# Altium PCB PCB.PcbDoc
Units mil, origin at the board's own origin, x right, y up, seen from the top; angles counter-clockwise.
Board outline 6000 x 4000 mil, 2 copper layers (Top Layer, Bottom Layer); 80 components, 95 nets, 329 pads, 0 vias.
Unrouted connection lines stored in the file: 164.
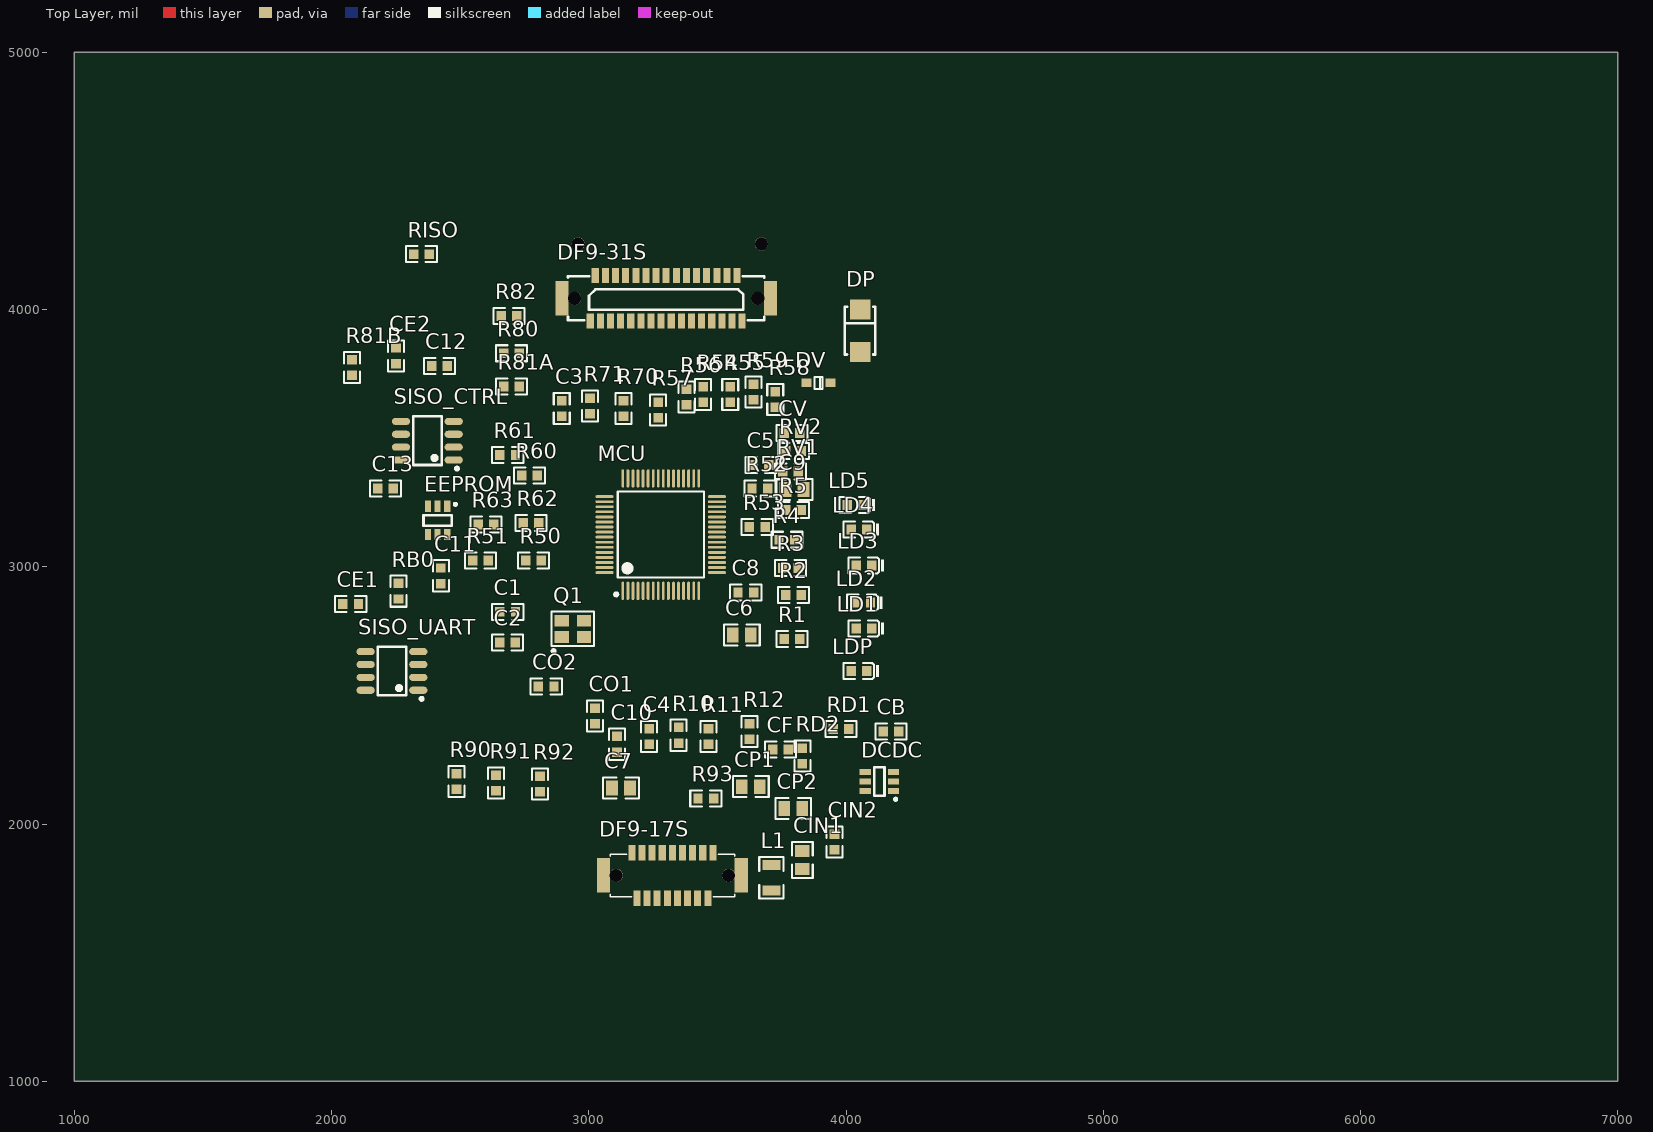
[diagram p0: Top Layer view]
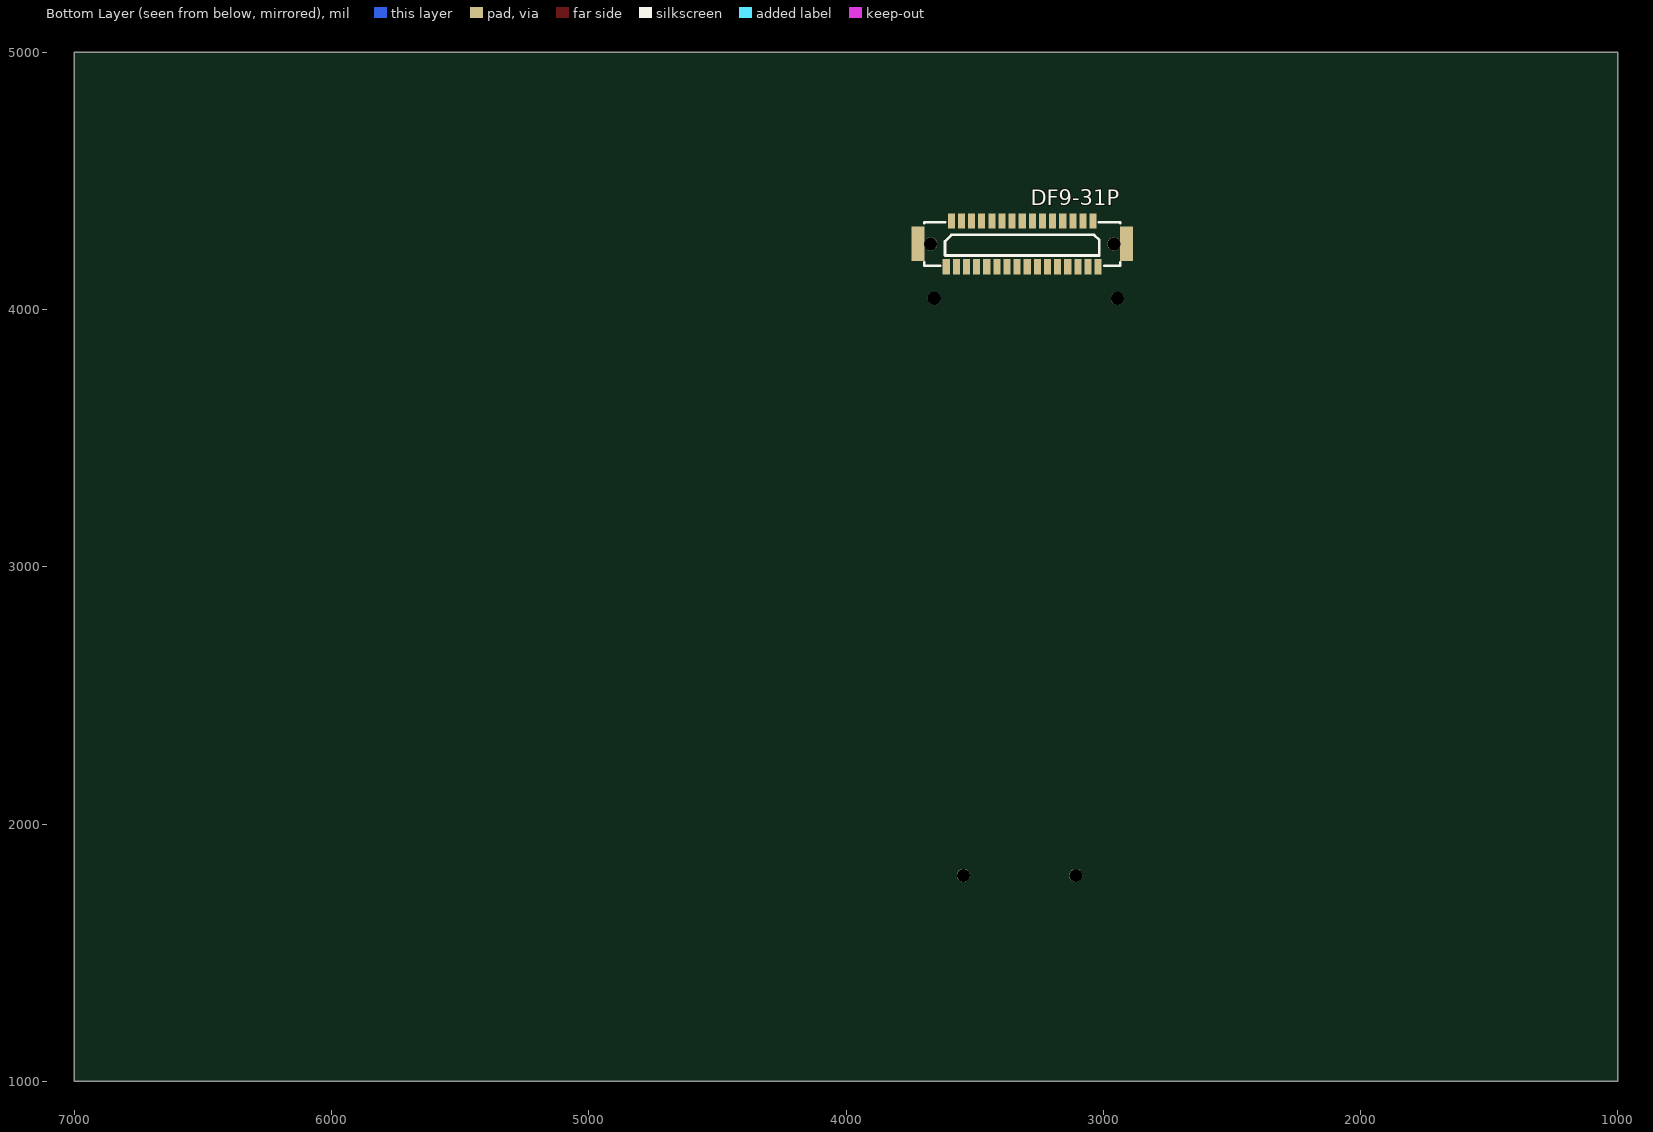
[diagram p1: Bottom Layer view, seen from below]

## Layer stack, top to bottom
Top Solder: solder mask 0.4, Solder Resist, Dk 3.5
Top Layer: signal copper 1.4
Dielectric 1: dielectric 12.6, FR-4, Dk 4.8
Bottom Layer: signal copper 1.4
Bottom Solder: solder mask 0.4, Solder Resist, Dk 3.5

## Board outline
1000,1000 7000,1000 7000,5000 1000,5000

## Design rules (kind name [scope] priority, off if disabled: settings)
Clearance [All] p1: gap=10 ignorepadtopadclearanceinfootprint=FALSE except(0: Arc-Hole Track-Hole SMDPad-Hole THPad-Hole Via-Hole Fill-Hole Poly-Hole Region-Hole Text-Hole)
PolygonConnect [All] p1: connectstyle=Relief reliefconductorwidth=10 reliefentries=4 polygonreliefangle="90 Angle" airgapwidth=10
RoutingVias [All] p1: holewidth=28 width=50 viastyle="Through Hole" minholewidth=28 minwidth=50 maxholewidth=28 maxwidth=50
SolderMaskExpansion [All] p1: expansion=4 istentingtop=FALSE
Width [All] p1: maxlimit=10 minlimit=10 preferedwidth=10
30 further rules are at their usual default settings.

## Components (designator, comment, footprint, x,y, rotation, side; value= is the part's Value field where it differs from the comment)
C1 "100n" LC-0603_R 2685,2825 r0 top
C2 "100n" LC-0603_R 2684.68,2705 r0 top
C3 "100n" LC-0603_R 2895,3615 r90 top
C4 "100n" LC-0603_R 3235,2340 r90 top
C5 "100n" LC-0603_R 3669.68,3395 r0 top
C6 "4u7 (3V3)" LC-0805_R 3595,2735 r0 top
C7 "1u (3V3)" LC-0805_R 3125,2140 r0 top
C8 "100n" LC-0603_R 3610.31,2900 r0 top
C9 "4u7 (3V3)" LC-0805_R 3800.04,3300 r0 top
C10 "100n" LC-0603_R 3110.31,2310 r90 top
C11 "100n" LC-0603_R 2424.68,2965 r90 top
C12 "100n" LC-0603_R 2419.68,3780 r0 top
C13 "100n" LC-0603_R 2210,3305 r0 top
CB "100n" LC-0603_R 4174.68,2360 r0 top
CE1 "100n" LC-0603_R 2074.68,2855 r0 top
CE2 "100n" LC-0603_R 2250,3820 r90 top
CF "56p" LC-0603_R 3745,2290 r0 top
CIN1 "10u (16V)" LC-0805_R 3830,1859.96 r90 top
CIN2 "100n" LC-0603_R 3955,1930 r90 top
CO1 "10p" LC-0603_R 3025,2420 r90 top
CO2 "10p" LC-0603_R 2834.68,2535 r0 top
CP1 "22u (3V3)" LC-0805_R 3629.96,2145 r0 top
CP2 "22u (3V3)" LC-0805_R 3795,2060 r0 top
CV "10nF" LC-0603_R 3790,3520 r0 top
DCDC "TPS54202" LC-SOT-23-6 4130,2165 r0 top
DF9-17S "DF9-17S" CONN-SMD_DF9-17S-1V-32 3325,1800 r180 top
DF9-31P "DF9-31S" CONN-SMD_DF9-31S-1V 3315,4255 r180 bottom
DF9-31S "DF9-31S" CONN-SMD_DF9-31S-1V 3300.95,4043.58 r0 top
DP "low Vf Schottky" LC-SMA(DO-214AC)_S1 4055,3917.68 r270 top
DV "( MM3Z3V3T1G )" LC-SOD-323 3893.54,3715 r180 top
EEPROM "24AA025UID" LC-SOT-23-6 2412.6,3179.88 r90 top
L1 "10u" "LC-SMD-3215_2P FC - 135" 3710,1790.79 r90 top
LD1 "GREEN" LC-0603_LED_S1 4069.69,2760 r180 top
LD2 "WHITE" LC-0603_LED_S1 4065,2860.31 r180 top
LD3 "YELLOW" LC-0603_LED_S1 4070,3005 r180 top
LD4 "RED" LC-0603_LED_S1 4050,3145 r180 top
LD5 "ORANGE" LC-0603_LED_S1 4035,3240 r180 top
LDP "BLUE" LC-0603_LED_S1 4050,2594.68 r180 top
MCU "STM32F446RE_LQFP64" LC-LQFP-64_10x10x05P 3280,3125 r0 top
Q1 "TSX-3225" LC-SMD-3225_4P 2938.31,2758.5 r0 top
R1 "15k" LC-0603_R 3790.31,2720 r0 top
R2 "3k3" LC-0603_R 3795.31,2890 r0 top
R3 "1k8" LC-0603_R 3784.68,2995 r0 top
R4 "1k8" LC-0603_R 3770,3105 r0 top
R5 "1k8" LC-0603_R 3795.31,3220 r0 top
R10 "1k" LC-0603_R 3349.68,2345 r90 top
R11 "1k" LC-0603_R 3465,2340 r90 top
R12 "1k" LC-0603_R 3625,2360 r90 top
R50 "1k" LC-0603_R 2785,3024.68 r0 top
R51 "100k" LC-0603_R 2579.68,3025 r0 top
R52 "1k" LC-0603_R 3665,3305 r0 top
R53 "100k" LC-0603_R 3655,3155 r0 top
R54 "( 1k )" LC-0603_R 3445,3669.68 r90 top
R55 "( 100k )" LC-0603_R 3550,3670 r90 top
R56 "470" LC-0603_R 3380,3659.68 r90 top
R57 "470" LC-0603_R 3270,3610 r90 top
R58 "470" LC-0603_R 3725,3650 r90 top
R59 "100k" LC-0603_R 3640,3680 r90 top
R60 "330" LC-0603_R 2770,3354.68 r0 top
R61 "4k7" LC-0603_R 2685,3435 r0 top
R62 "330" LC-0603_R 2775,3170 r0 top
R63 "4k7" LC-0603_R 2600,3164.68 r0 top
R70 "470" LC-0603_R 3135,3614.68 r90 top
R71 "470" LC-0603_R 3005,3625.31 r90 top
R80 "1k" LC-0603_R 2699.68,3830 r0 top
R81A "( 100k )" LC-0603_R 2700,3700.31 r0 top
R81B "( 100k )" LC-0603_R 2080,3775 r90 top
R82 "1k" LC-0603_R 2690.31,3975 r0 top
R90 "1k" LC-0603_R 2485,2165 r90 top
R91 "1k" LC-0603_R 2640,2159.68 r90 top
R92 "1k" LC-0603_R 2810,2155 r90 top
R93 "1k" LC-0603_R 3455,2099.68 r0 top
RB0 "10k" LC-0603_R 2260,2905 r90 top
RD1 "22k" LC-0603_R 3980,2370 r0 top
RD2 "100k" LC-0603_R 3830,2264.68 r90 top
RISO "10M" LC-0603_R 2350,4215 r0 top
RV1 "22k" LC-0603_R 3784.68,3370 r0 top
RV2 "100k" LC-0603_R 3795.31,3450 r0 top
SISO_CTRL "ISO7021F" LC-SOP-8_150mil 2372.64,3490 r90 top
SISO_UART "ISO7021" LC-SOP-8_150mil 2235,2595 r90 top

## Footprints (in the part's own frame and the unit in brackets; to place one, negate y for a bottom-side part, rotate by r counter-clockwise, add the part's x,y. Pads: shape width x height; smd on the part's side, far side on the other; paste and mask are expansions set on the pad)
CONN-SMD_DF9-17S-1V-32 [mm]
  rect 0.7x1.5 smd paste+0 mask+0.051: 1(-4,-2.25) 2(-3.5,2.25) 3(-3,-2.25) 4(-2.5,2.25) 5(-2,-2.25) 6(-1.5,2.25) 7(-1,-2.25) 8(-0.5,2.25) 9(0,-2.25) 10(0.5,2.25) 11(1,-2.25) 12(1.5,2.25) 13(2,-2.25) 14(2.5,2.25) 15(3,-2.25) 16(3.5,2.25) 17(4,-2.25)
  rect 1.3x3.4 smd paste+0 mask+0.051: 18(6.8,0) 19(-6.8,0)
  round 1.3 hole 1.3 unplated paste+0: ""(-5.55,0) ""(5.55,0)
  silkscreen extent -6.15,-2.1 6.15,2.1
CONN-SMD_DF9-31S-1V [mm]
  rect 0.7x1.5 smd paste+0 mask+0.051: 1(-7.5,-2.25) 2(-7,2.25) 3(-6.5,-2.25) 4(-6,2.25) 5(-5.5,-2.25) 6(-5,2.25) 7(-4.5,-2.25) 8(-4,2.25) 9(-3.5,-2.25) 10(-3,2.25) 11(-2.5,-2.25) 12(-2,2.25) 13(-1.5,-2.25) 14(-1,2.25) 15(-0.5,-2.25) 16(0,2.25) 17(0.5,-2.25) 18(1,2.25) 19(1.5,-2.25) 20(2,2.25) 21(2.5,-2.25) 22(3,2.25) 23(3.5,-2.25) 24(4,2.25) 25(4.5,-2.25) 26(5,2.25) 27(5.5,-2.25) 28(6,2.25) 29(6.5,-2.25) 30(7,2.25) 31(7.5,-2.25)
  rect 1.3x3.4 smd paste+0 mask+0.051: 32(10.3,0) 33(-10.3,0)
  round 1.3 hole 1.3 unplated paste+0: ""(-9.05,0) ""(9.05,0)
  silkscreen extent -9.69,-2.16 9.69,2.16
LC-0603_LED_S1 [mm]
  rect 0.93x0.98 smd: A(0.77,0) K(-0.77,0)
  silkscreen extent -1.98,-0.79 1.54,0.79, body extent -0.8,-0.4 0.8,0.4, height 0.6
LC-0603_R [mm]
  rect 0.93x0.98 smd: 1(-0.77,0) 2(0.77,0)
  silkscreen extent -1.53,-0.79 1.54,0.79, body extent -0.85,-0.4 0.85,0.4, height 0.56
LC-0805_R [mm]
  rect 1.16x1.47 smd: 1(-0.89,0) 2(0.89,0)
  silkscreen extent -1.77,-1.04 1.77,1.03, body extent -1,-0.62 1,0.63, height 0.49
LC-LQFP-64_10x10x05P [mm]
  oval 0.28x1.8 smd mask+0.051: 1(-3.75,-5.55) 2(-3.25,-5.55) 3(-2.75,-5.55) 4(-2.25,-5.55) 5(-1.75,-5.55) 6(-1.25,-5.55) 7(-0.75,-5.55) 8(-0.25,-5.55) 9(0.25,-5.55) 10(0.75,-5.55) 11(1.25,-5.55) 12(1.75,-5.55) 13(2.25,-5.55) 14(2.75,-5.55) 15(3.25,-5.55) 16(3.75,-5.55) 33(3.75,5.55) 34(3.25,5.55) 35(2.75,5.55) 36(2.25,5.55) 37(1.75,5.55) 38(1.25,5.55) 39(0.75,5.55) 40(0.25,5.55) 41(-0.25,5.55) 42(-0.75,5.55) 43(-1.25,5.55) 44(-1.75,5.55) 45(-2.25,5.55) 46(-2.75,5.55) 47(-3.25,5.55) 48(-3.75,5.55)
  oval 1.8x0.28 smd mask+0.051: 17(5.55,-3.75) 18(5.55,-3.25) 19(5.55,-2.75) 20(5.55,-2.25) 21(5.55,-1.75) 22(5.55,-1.25) 23(5.55,-0.75) 24(5.55,-0.25) 25(5.55,0.25) 26(5.55,0.75) 27(5.55,1.25) 28(5.55,1.75) 29(5.55,2.25) 30(5.55,2.75) 31(5.55,3.25) 32(5.55,3.75) 49(-5.55,3.75) 50(-5.55,3.25) 51(-5.55,2.75) 52(-5.55,2.25) 53(-5.55,1.75) 54(-5.55,1.25) 55(-5.55,0.75) 56(-5.55,0.25) 57(-5.55,-0.25) 58(-5.55,-0.75) 59(-5.55,-1.25) 60(-5.55,-1.75) 61(-5.55,-2.25) 62(-5.55,-2.75) 63(-5.55,-3.25) 64(-5.55,-3.75)
  silkscreen extent -4.55,-6.05 4.25,4.25
LC-SMA(DO-214AC)_S1 [mm]
  rect 2x2 smd: 1(2.1,0) 2(-2.1,0)
  silkscreen extent -2.35,-1.5 2.35,1.5
"LC-SMD-3215_2P FC - 135" [mm]
  rect 1x1.8 smd: 1(-1.25,0) 2(1.25,0)
  silkscreen extent -2.05,-1.2 2.05,1.2
LC-SMD-3225_4P [mm]
  rect 1.4x1.15 smd: 1(-1.1,-0.8) 2(1.1,-0.8) 3(1.1,0.8) 4(-1.1,0.8)
  silkscreen extent -2.1,-2.35 2.1,1.7, body extent -1.6,-1.25 1.6,1.25, height 0.61
LC-SOD-323 [mm]
  rect 1x0.83 smd: 1(1.18,0) 2(-1.18,0)
  silkscreen extent -0.4,-0.6 0.4,0.6, body extent -1.35,-0.62 1.35,0.63, height 1.1
LC-SOP-8_150mil [mm]
  oval 0.7x1.8 smd: 1(-1.905,-2.6) 2(-0.635,-2.6) 3(0.635,-2.6) 4(1.905,-2.6) 5(1.905,2.6) 6(0.635,2.6) 7(-0.635,2.6) 8(-1.905,2.6)
  silkscreen extent -2.9,-3.08 2.4,1.4, body extent -2.5,-3.1 2.5,3.1, height 1.75
LC-SOT-23-6 [mm]
  rect 1.1x0.6 smd: 1(1.4,-0.95) 2(1.4,0) 3(1.4,0.95) 4(-1.4,0.95) 5(-1.4,0) 6(-1.4,-0.95)
  silkscreen extent -0.5,-1.87 1.73,1.4

## Part data
C1 C2 C3 C4 C5 C8 C10 C11 C12 C13 CB CE1 CE2 CF CIN2 CO1 CO2 CV: library part CC0603, DeviceName=C0603, DeviceSetName=C, GateName_1=G$1, LibraryName=myrcl, SpiceOrder1="SpiceOrder 1", SpiceOrder2="SpiceOrder 2", SymbolName_1=C
C6 C7 C9 CIN1 CP1 CP2: library part CC0805, DeviceName=C0805, DeviceSetName=C, GateName_1=G$1, LibraryName=myrcl, SpiceOrder1="SpiceOrder 1", SpiceOrder2="SpiceOrder 2", SymbolName_1=C
DCDC: PARTNUMBER=TPS54202DDCR, DeviceSetName=TPS54202, GateName_1=A, LibraryName=tps54202, MOUNTTYPE=SMT, SymbolName_1=TPS54202DDC
DF9-31P DF9-31S: "SMD CONNECTOR   Source: con-hirose.lbr from Bob Starr <rtzaudio@mindspring.com>", MPN=DF9-31S-1V(32), DeviceSetName=DF9-31S, GateName_1=DF9, LibraryName=con-hirose, MF=MF, OC_FARNELL=1798382, OC_NEWARK=74R3383, SymbolName_1=DF9-31S
DP: library part DIODE-DO-214AC, "DIODE", DeviceName=DO-214AC, DeviceSetName=DIODE-, GateName_1=G$1, LibraryName=diode, SpiceOrder1="SpiceOrder 1", SpiceOrder2="SpiceOrder 2", SymbolName_1=D
DV: library part DSOD323, "DIODE", MPN=CDSOD323-T05C, DeviceName=SOD323, DeviceSetName=D, GateName_1=G$1, LibraryName=zetex, MF=MF, OC_FARNELL=1824860, OC_NEWARK=79R6078, POPULARITY=0, SymbolName_1=DIODE
L1: library part VLCF5028-2, DeviceSetName=VLCF5028-2, GateName_1=G$1, LibraryName=VLCF5028, SymbolName_1=L-US
LD1 LD2 LD3 LD4 LD5 LDP: library part LED0603, DeviceSetName=LED0603, GateName_1=G$1, LibraryName=myrcl, SymbolName_1=LED
Q1: library part KX-7, "Quartz Crystals (MHz) SMD: KX - Serie                  	                 Model    	          Size l/w/h [mm]    	          Frequency Range    	          Frequency       Stability    	          Temp. Range [掳C]     	          Load       Capacitance    	          AECQ 200       availabel    	          Datasheet    	                 KX-4       KX-5       KX-6       KX-7       KX-9A       KX-9B       KX-12A       KX-12B       KX-13       KX-20       KX-K       KX-KS      	          1.6/1.2/0.3       2.0/1.6/0.45       2.5/2.0/0.55       3.2/2.5/0.8       5.0/3.2/1.0        5.0/3.2/1.1        6.0/3.5/1.1        6.0/3.5/1.0        7.0/5.0 /1.3        11.6/5.5/1.6        12.3/4.5/4.2        12.3/4.5/3.2      	          24.0 ~ 80.0 MHz       16.0 ~ 80.0 MHz       12.0 ~ 80.0 MHz       8.0 ~ 60.0 MHz       7,68 ~ 300,0 MHz       8,0 ~ 50,0 MHz       8,0 ~ 150,0 MHz       8,0 ~ 50,0 MHz       6,0 ~ 160,0 MHz       3,579 ~ 25,0 MHz       3,579 ~ 70,0 MHz       3,579 ~ 70,0 MHz     	          卤10 鈥?卤50ppm       卤10 鈥?卤50ppm       卤10 鈥?卤50ppm       卤10 鈥?卤50ppm       卤10 鈥?卤50ppm       卤10 鈥?卤50ppm       卤10 鈥?卤50ppm       卤10 鈥?卤50ppm       卤10 鈥?卤50ppm       卤50ppm       卤10 鈥?卤50ppm       卤10 鈥?卤50ppm     	         (*) -40掳C 鈥?85掳C      (*) -40掳C 鈥?125掳C      (*) -40掳C 鈥?125掳C      (*) -40掳C 鈥?125掳C      (*) -40掳C 鈥?105掳C      (*) -40掳C 鈥?105掳C      (*) -40掳C 鈥?125掳C      (*) -40掳C 鈥?105掳C      (*) -40掳C 鈥?105掳C      (*) -40掳C 鈥?105掳C      (*) -40掳C 鈥?85掳C      (*) -40掳C 鈥?85掳C     	          8, 8鈥?6       8, 8鈥?6       10, 8鈥?6       12, 7鈥?0       16, 10鈥?0       16, 10鈥?0       16, 10鈥?0       16, 12鈥?0       16, 12鈥?0       16, 12鈥?0       16, 12鈥?0       16, 12鈥?0     	         -      yes       yes     yes       -       -       -       -       -       -       -       -     	          KX-4.pdf       KX-5.pdf       KX-6.pdf       KX-7.pdf       KX-9A.pdf       KX-9B.pdf       KX-12A.pdf       KX-12B.pdf       KX-13.pdf       KX-20.pdf       KX-K.pdf       KX-KS.pdf     	  	       Details see: http://www.geyer-electronic.de/Frequenz-Produkte.9.0.html   Created 2016-06-07, Hans Locher 2016 (C) Geyer Quartz Technology   KX4,KX5,KX6,KX7,KX9A,KX9B,KX12A,KX12B,KX13,KX20,KXK,KXKS;1612;2016;2520;3225;5032;6035;7050;11655;12345;1,6x1,2;2,0x1,6;2,5x2,0;3,2x2,5;5,0x3,2;6,0x3,5;7,0x5,0;11,6x5,5;12,3x4,5;12,3x4,5;1.6x1.2;2.0x1.6;2.5x2.0;3.2x2.5;5.0x3.2;6.0x3.5;7.0x5.0;11.6x5.5;12.3x4.5;12.3x4.5;", 1=1, 2=2, DeviceName=-7, DeviceSetName=KX, GateName_1=G$1, LibraryName=crystal-geyer_V1_0, SymbolName_1=Q
R1 R2 R3 R4 R5 R10 R11 R12 R50 R51 R52 R53 R54 R55 R56 R57 R58 R59 R60 R61 R62 R63 R70 R71 R80 R81A R81B R82 R90 R91 R92 R93 RB0 RD1 RD2 RISO RV1 RV2: library part RR0603, DeviceName=R0603, DeviceSetName=R, GateName_1=G$1, LibraryName=myrcl, SpiceOrder1="SpiceOrder 1", SpiceOrder2="SpiceOrder 2", SymbolName_1=R
SISO_CTRL: library part ISO7021, DeviceSetName=ISO7021, GateName_1=G$1, LibraryName=iso7021, SymbolName_1=ISO7021
DF9-17S: DeviceSetName=DF9-17S, GateName_1=G$1, LibraryName=con-hirose, SymbolName_1=DF9-17S
EEPROM: Array=Array, DeviceSetName=24AA025UID, EEPROM=EEPROM, GateName_1=G$1, GND=GND, LibraryName=24AA02UID, SymbolName_1=24AA, VCC=VCC
MCU: DeviceSetName=STM32F446RE_LQFP64, GateName_1=G$1, LibraryName=stm32f446re, SymbolName_1=STM32F446RE
SISO_UART: DeviceSetName=ISO7021, GateName_1=G$1, LibraryName=iso7021, SymbolName_1=ISO7021

## Nets (pads, with @x,y where several pads share a name; then routed paths per layer and width w, separated by ;. In a path a pad name is that pad's centre, name@x,y a point inside that pad or via, vN(x,y) a via of type N, cw(c..) or ccw(c..) an arc to the next point about the centre after c; other vN are vias at no path point)
+3V3: C1.1 C2.1 C3.1 C4.1 C5.1 C6.1 C7.1 C8.1 C11.1 C12.1 C13.1 CF.1 CP1.1 CP2.1 DF9-17S.1 DF9-31P.20 DF9-31P.28 DF9-31S.4 DF9-31S.12 EEPROM.6 L1.2 MCU.32 MCU.48 MCU.64 R50.2 R51.1 R51.2 R53.1 R55.1 R61.2 R63.2 RD2.2 SISO_CTRL.8 SISO_UART.8
+12V: CIN1.1 CIN2.1 DCDC.3 DF9-31P.16 DF9-31P.17 DF9-31S.15 DF9-31S.16 RV2.2
DGND: C1.2 C2.2 C3.2 C4.2 C5.2 C6.2 C7.2 C8.2 C9.2 C10.2 C11.2 C12.2 C13.2 CO1.2 CO2.2 CP1.2 CP2.2 CV.2 DF9-17S.5 DF9-31P.4 DF9-31S.28 DV.2 EEPROM.2 EEPROM.4 EEPROM.5 MCU.31 MCU.47 MCU.63 Q1.2 Q1.4 R59.1 R81A.1 RB0.1 RD1.1 RISO.2 RV1.1 SISO_CTRL.5 SISO_UART.5
GND: CIN1.2 CIN2.2 DCDC.1 DF9-31P.18 DF9-31P.19 DF9-31S.13 DF9-31S.14
GNDI: CE1.2 CE2.2 DF9-17S.8 R81B.2 RISO.1 SISO_CTRL.4 SISO_UART.4
NetC9_1: C9.1
NetC10_1: C10.1 R93.2
NetCB_1: CB.1 DCDC.6
NetCB_2: CB.2 DCDC.2 L1.1
NetCE1_1: CE1.1 CE2.1 DF9-17S.6 SISO_CTRL.1 SISO_UART.1
NetCF_2: CF.2 DCDC.4 RD1.2 RD2.1
NetCO1_1: CO1.1 Q1.3
NetCO2_1: CO2.1 Q1.1
NetCOM_2: 
NetCOM_4: DF9-17S.4 SISO_UART.3
NetCOM_5: DF9-17S.2 SISO_UART.2
NetCOM_6: 
NetCOM_7: DF9-17S.12 SISO_CTRL.2
NetCOM_8: DF9-17S.10 R81B.1 SISO_CTRL.3
NetCV_1: CV.1 DV.1 RV1.2 RV2.1
NetDCDC_5: DCDC.5
NetDF9-17S_3: DF9-17S.3 R90.2
NetDF9-17S_7: DF9-17S.7 R91.2
NetDF9-17S_9: DF9-17S.9 R93.1
NetDF9-17S_11: DF9-17S.11 R92.1
NetDF9-17S_13: DF9-17S.13 R1.2
NetDF9-17S_14: DF9-17S.14 R5.2
NetDF9-17S_15: DF9-17S.15 R2.2
NetDF9-17S_16: DF9-17S.16 R4.2
NetDF9-17S_17: DF9-17S.17 R3.2
NetDF9-31P_1: DF9-31P.1 DF9-31S.31
NetDF9-31P_2: DF9-31P.2 DF9-31S.30
NetDF9-31P_3: DF9-31P.3 DF9-31S.29
NetDF9-31P_5: DF9-31P.5 DF9-31S.27
NetDF9-31P_6: DF9-31P.6 DF9-31S.26
NetDF9-31P_7: DF9-31P.7 DF9-31S.25
NetDF9-31P_8: DF9-31P.8 DF9-31S.24
NetDF9-31P_9: DF9-31P.9 DF9-31S.23
NetDF9-31P_10: DF9-31P.10 DF9-31S.22
NetDF9-31P_11: DF9-31P.11 DF9-31S.21
NetDF9-31P_12: DF9-31P.12 DF9-31S.20
NetDF9-31P_13: DF9-31P.13 DF9-31S.19
NetDF9-31P_14: DF9-31P.14 DF9-31S.18
NetDF9-31P_15: DF9-31P.15 DF9-31S.17
NetDF9-31P_21: DF9-31P.21 DF9-31S.11 R10.2
NetDF9-31P_22: DF9-31P.22 DF9-31S.10 R12.2
NetDF9-31P_23: DF9-31P.23 DF9-31S.9 R11.2
NetDF9-31P_24: DF9-31P.24 DF9-31S.8 R62.2 R63.1
NetDF9-31P_25: DF9-31P.25 DF9-31S.7 EEPROM.1 R60.2 R61.1
NetDF9-31P_26: DF9-31P.26 DF9-31S.6 R54.2 R55.2
NetDF9-31P_27: DF9-31P.27 DF9-31S.5 R52.2 R53.2
NetDF9-31P_29: DF9-31P.29 DF9-31S.3 R56.2
NetDF9-31P_30: DF9-31P.30 DF9-31S.2 R57.1
NetDF9-31P_31: DF9-31P.31 DF9-31S.1 R58.1
NetDP_A: 
NetH-B1-L_2: 
NetLD1_1: R1.1
NetLD2_1: R2.1
NetLD3_1: R3.1
NetLD4_1: R4.1
NetLD5_1: R5.1
NetLDP_1: 
NetMCU_P$2: 
NetMCU_P$3: 
NetMCU_P$4: 
NetMCU_P$14: R10.1
NetMCU_P$15: R11.1
NetMCU_P$16: R12.1
NetMCU_P$20: 
NetMCU_P$21: 
NetMCU_P$27: 
NetMCU_P$29: R52.1
NetMCU_P$33: R54.1
NetMCU_P$34: R56.1
NetMCU_P$35: R58.2 R59.2
NetMCU_P$36: R57.2
NetMCU_P$41: R80.2
NetMCU_P$42: R70.1
NetMCU_P$43: R71.1
NetMCU_P$46: R91.1
NetMCU_P$49: R90.1
NetMCU_P$52: R82.2
NetMCU_P$55: R92.2
NetMCU_P$57: 
NetMCU_P$58: R60.1
NetMCU_P$59: R62.1
NetMCU_P$60: RB0.2
NetMCU_P$61: 
NetMCU_P$62: R50.1
NetR70_2: R70.2 SISO_UART.7
NetR71_2: R71.2 SISO_UART.6
NetR80_1: R80.1 R81A.2 SISO_CTRL.6
NetR82_1: R82.1 SISO_CTRL.7
NetR?_1: 
NetR?_2: 
pads on no net: DF9-17S. DF9-17S.18 DF9-17S.19 DF9-31P. DF9-31P.32 DF9-31P.33 DF9-31S. DF9-31S.32 DF9-31S.33 DP.1 DP.2 EEPROM.3 LD1.A LD1.K LD2.A LD2.K LD3.A LD3.K LD4.A LD4.K LD5.A LD5.K LDP.A LDP.K MCU.1 MCU.2 MCU.3 MCU.4 MCU.5 MCU.6 MCU.7 MCU.8 MCU.9 MCU.10 MCU.11 MCU.12 MCU.13 MCU.14 MCU.15 MCU.16 MCU.17 MCU.18 MCU.19 MCU.20 MCU.21 MCU.22 MCU.23 MCU.24 MCU.25 MCU.26 MCU.27 MCU.28 MCU.29 MCU.30 MCU.33 MCU.34 MCU.35 MCU.36 MCU.37 MCU.38 MCU.39 MCU.40 MCU.41 MCU.42 MCU.43 MCU.44 MCU.45 MCU.46 MCU.49 MCU.50 MCU.51 MCU.52 MCU.53 MCU.54 MCU.55 MCU.56 MCU.57 MCU.58 MCU.59 MCU.60 MCU.61 MCU.62